# Altium PCB cw312_k82.PcbDoc
Units mm, origin at the board's own origin, x right, y up, seen from the top; angles counter-clockwise.
Board outline 58.68 x 53.69 mm, 2 copper layers (Top Layer, Bottom Layer); 20 components, 48 nets, 233 pads, 100 vias.
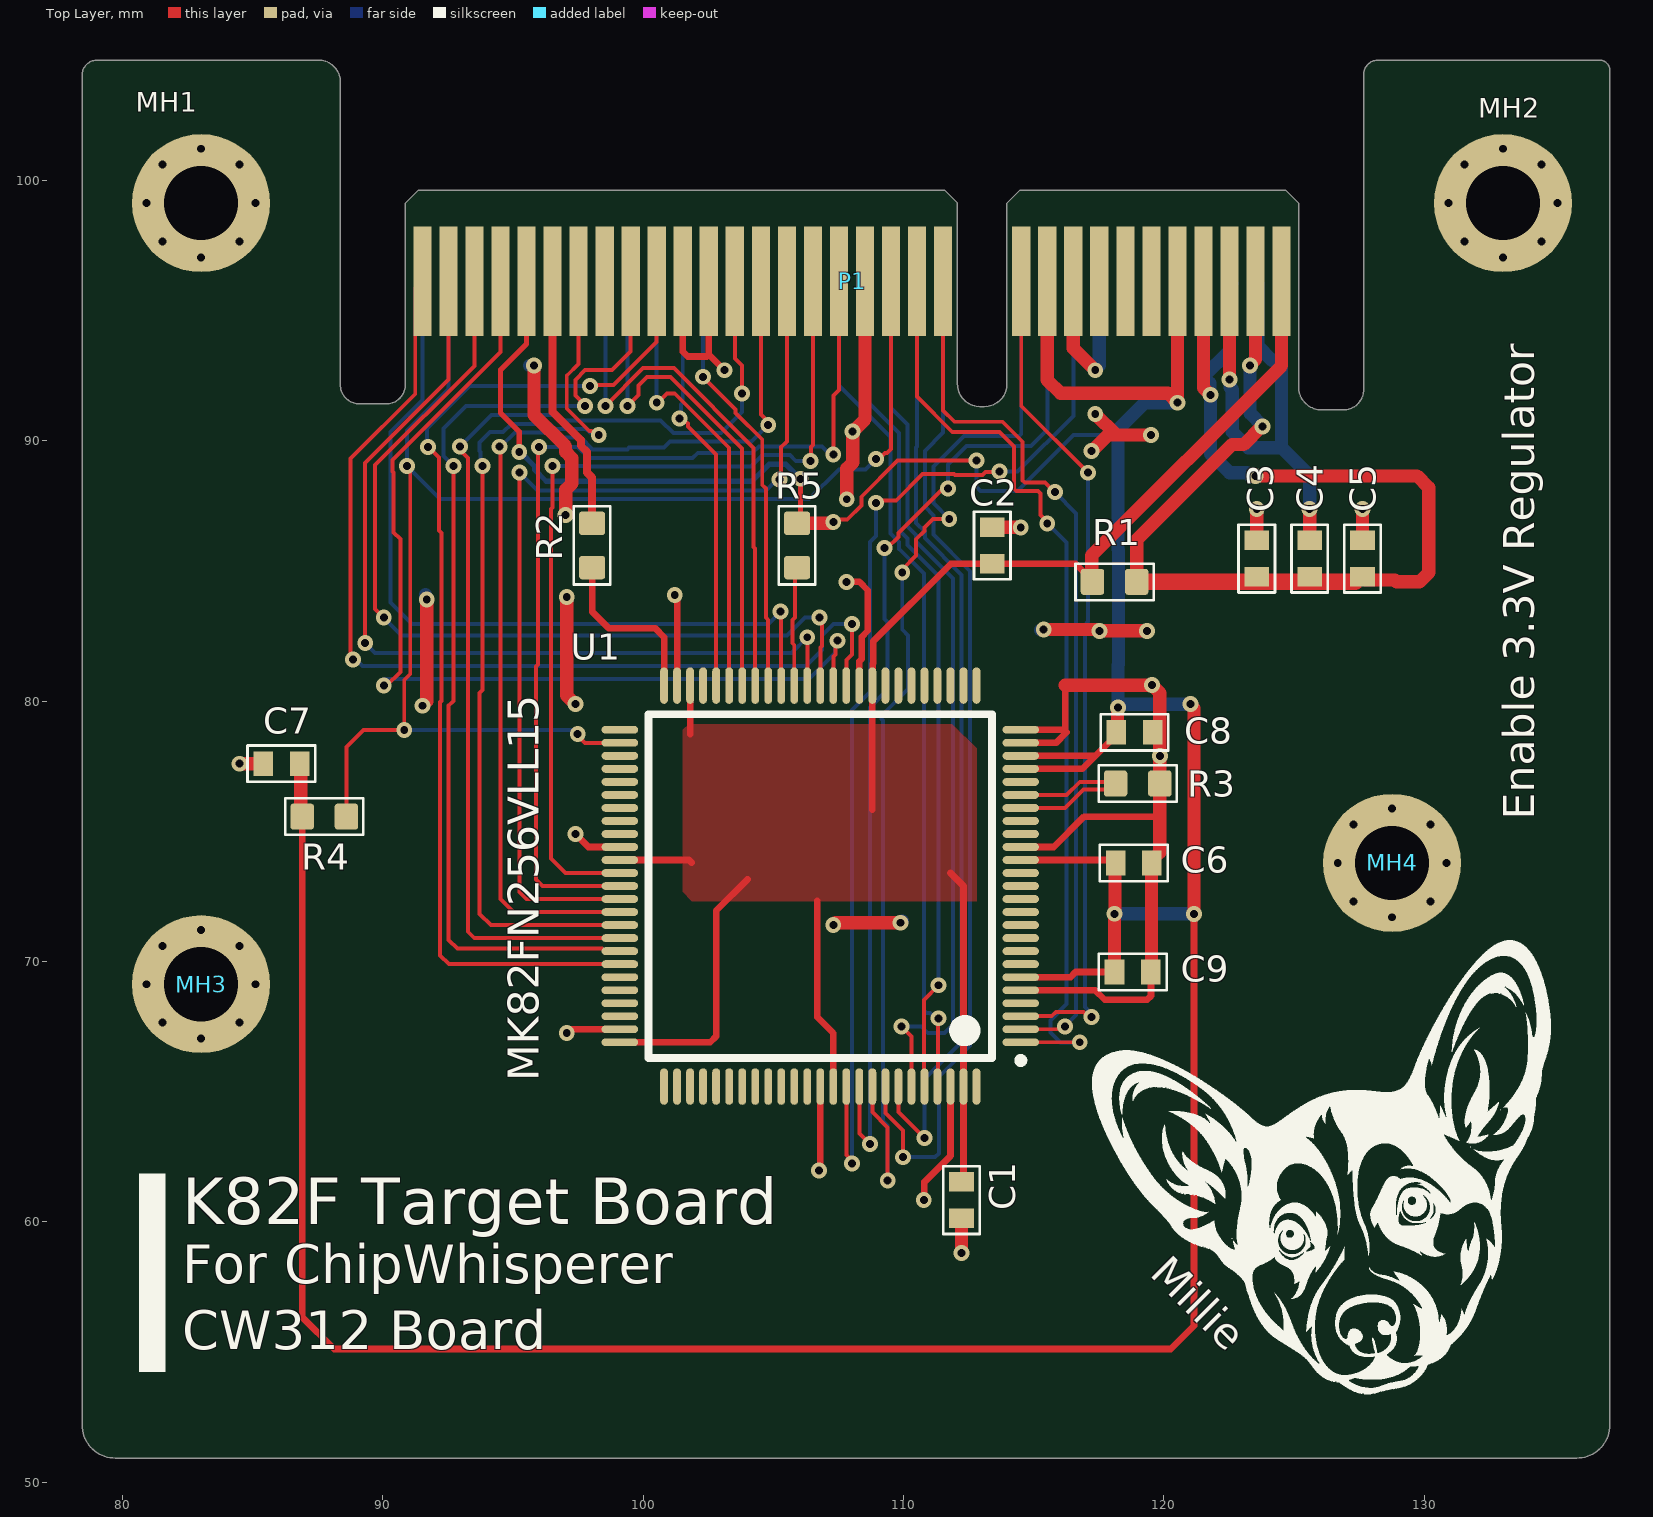
[diagram p0: Top Layer view]
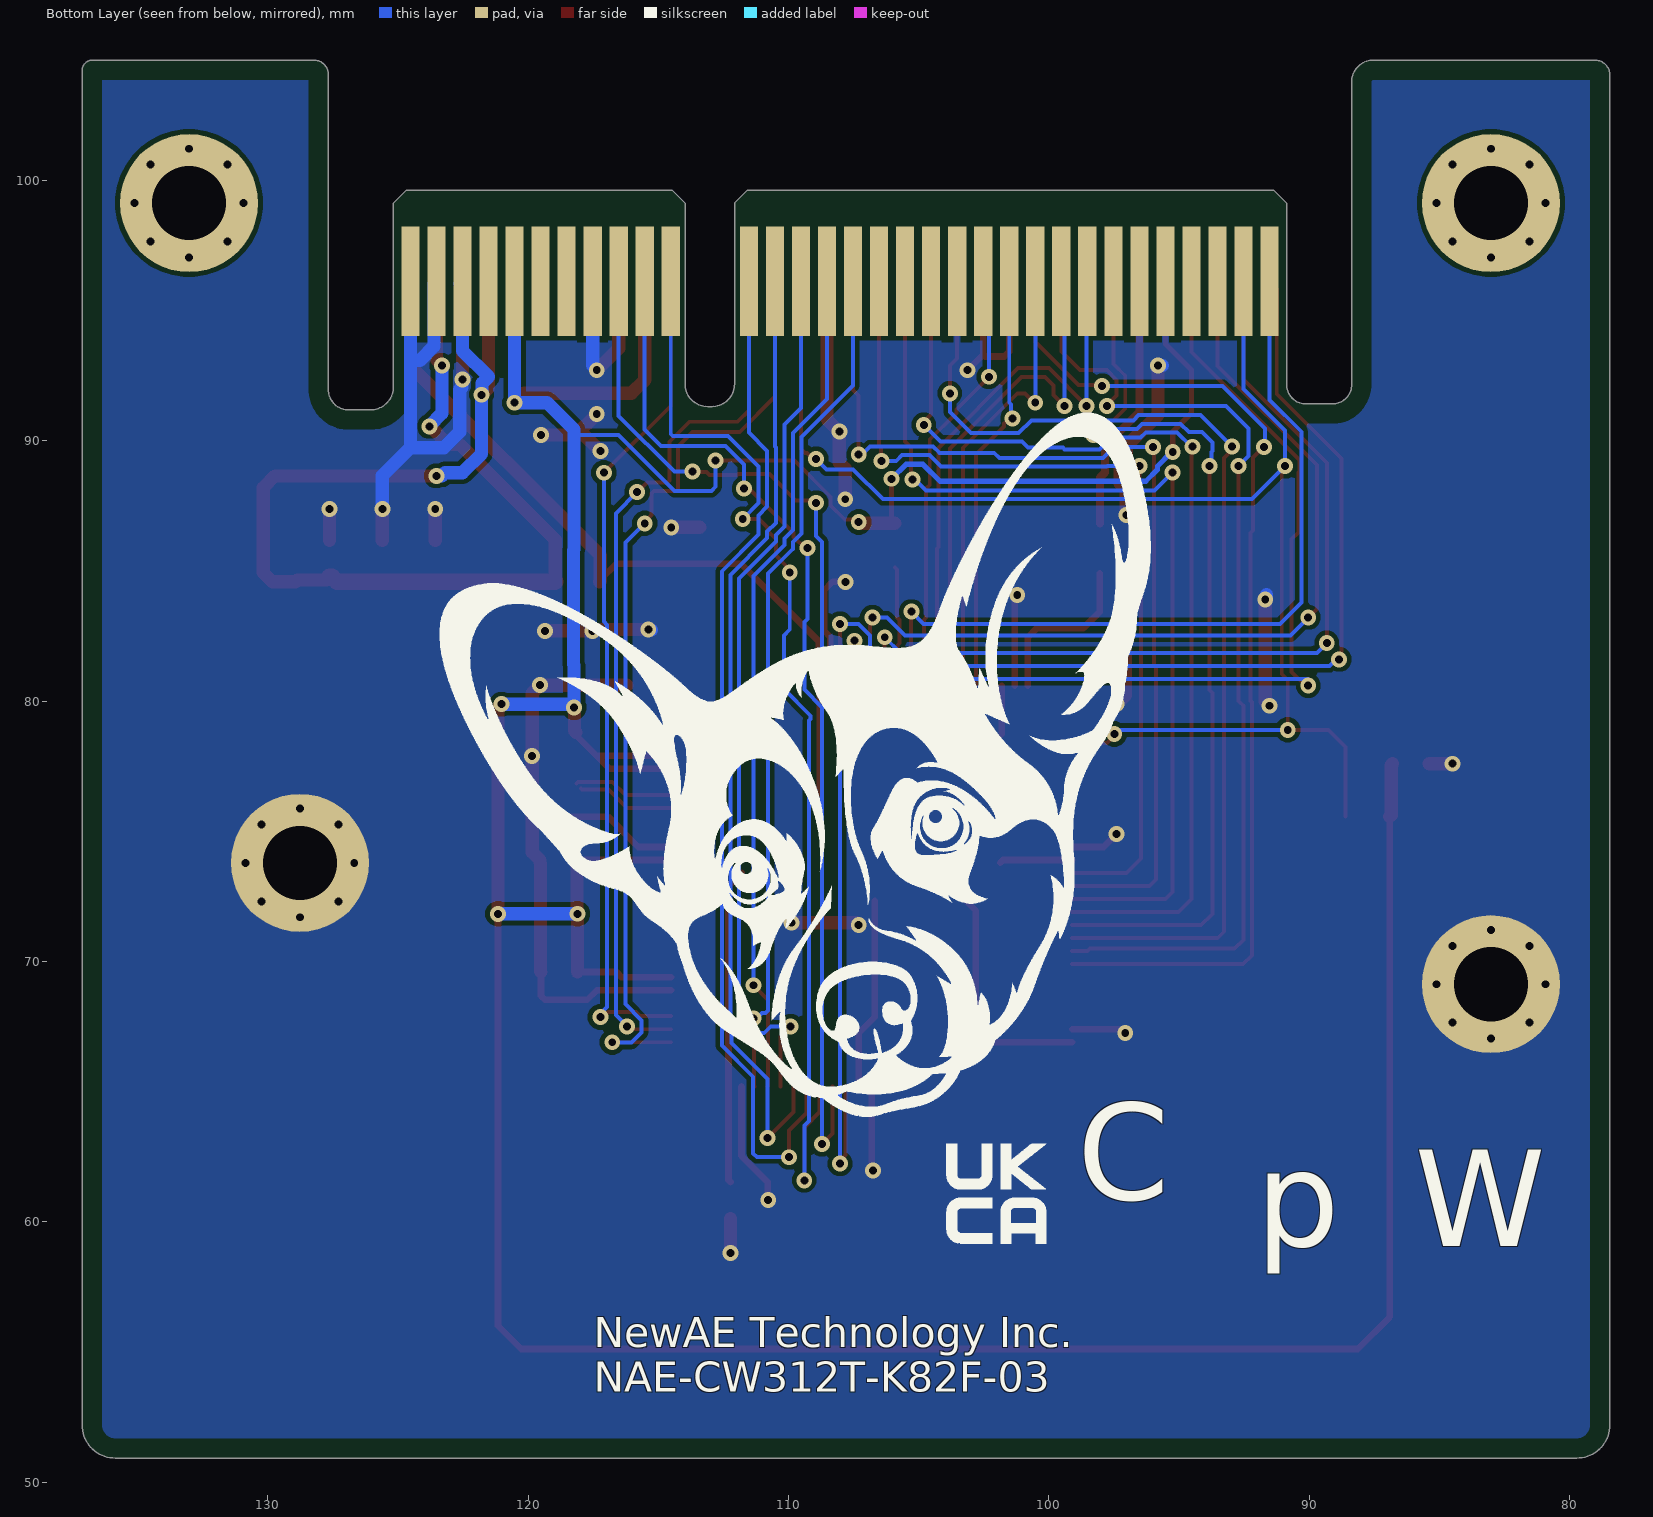
[diagram p1: Bottom Layer view, seen from below]
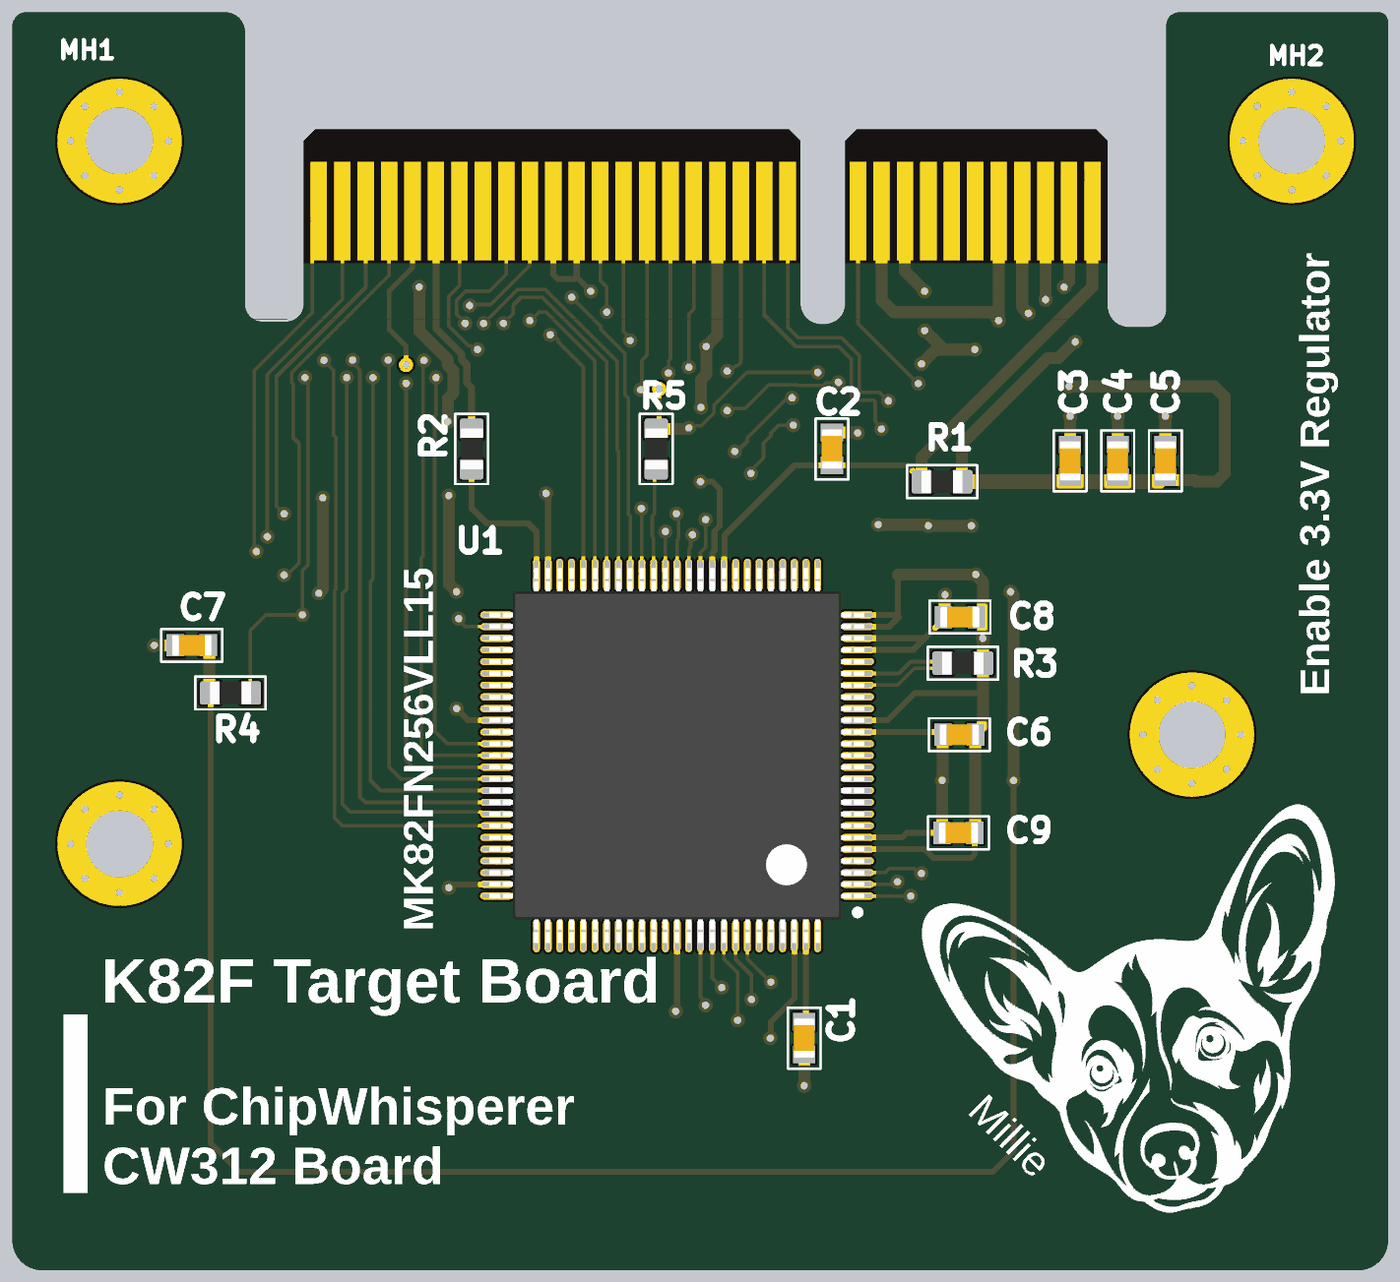
[diagram p2: 3D render of the assembled board from above, using the file's embedded part models]

## Layer stack, top to bottom
Top Solder: solder mask 0.0102, Solder Resist, Dk 3.5
Top Layer: signal copper 0.0356
Dielectric 1: dielectric 0.32, FR-4, Dk 4.8
Bottom Layer: signal copper 0.0356
Bottom Solder: solder mask 0.0102, Solder Resist, Dk 3.5

## Board outline
78.457,52.197 ccw(c79.727,52.197) 79.727,50.927 135.862,50.927 ccw(c135.862,52.197) 137.132,52.197 137.132,104.218 ccw(c136.732,104.218) 136.732,104.618 128.232,104.618 ccw(c128.232,104.061) 127.675,104.061 127.675,91.961 cw(c126.9,91.961) 126.9,91.186 126.064,91.186 cw(c126.064,92.075) 125.175,92.075 125.175,99.127 124.675,99.627 114.475,99.627 113.975,99.127 113.975,92.177 cw(c113.111,92.177) 113.111,91.313 112.939,91.313 cw(c112.939,92.177) 112.075,92.177 112.075,99.127 111.575,99.627 91.375,99.627 90.875,99.127 90.875,92.161 cw(c90.128,92.161) 90.128,91.415 89.114,91.415 cw(c89.114,92.153) 88.375,92.153 88.375,103.775 ccw(c87.532,103.775) 87.532,104.618 79.032,104.618 ccw(c79.032,104.043) 78.457,104.043

## Design rules (kind name [scope] priority, off if disabled: settings)
BoardOutlineClearance Silk_to_Outline [(OnLayer('Top Overlay'))] p1: gap=0 ignorepadtopadclearanceinfootprint=FALSE
BoardOutlineClearance [All] p2: gap=0.762 ignorepadtopadclearanceinfootprint=FALSE except(0.127: Track-OutlineEdge Track-CavityEdge Track-CutoutEdge Track-SplitBarrior Track-SplitContinuation SMDPad-OutlineEdge SMDPad-CavityEdge SMDPad-CutoutEdge SMDPad-SplitBarrior SMDPad-SplitContinuation)
Clearance [All] p1: gap=0.178 ignorepadtopadclearanceinfootprint=FALSE
HoleSize [All] p1: absolutevalues=TRUE maxlimit=5.08 minlimit=0.025 maxpercent=80.000 minpercent=20.000
MinimumSolderMaskSliver [All] p1: minsoldermaskwidth=0.127
PlaneConnect PlaneConnect_viaDirect [IsVia] p1: planeconnectstyle=Direct reliefexpansion=0.508 reliefentries=4 reliefconductorwidth=0.254 reliefairgap=0.254
PlaneConnect [All] p2: planeconnectstyle=Relief reliefexpansion=0.508 reliefentries=4 reliefconductorwidth=0.254 reliefairgap=0.254
PolygonConnect PolygonConnect_viaDirect [All vs isVia] p1: connectstyle=Direct reliefconductorwidth=0.254 reliefentries=4 polygonreliefangle="90 Angle" airgapwidth=0.254
PolygonConnect [All] p2: connectstyle=Relief reliefconductorwidth=0.254 reliefentries=4 polygonreliefangle="90 Angle" airgapwidth=0.254
RoutingVias [All] p1: holewidth=0.305 width=0.61 viastyle="Through Hole" minholewidth=0.305 minwidth=0.61 maxholewidth=2.54 maxwidth=5.08
SilkToSilkClearance [All] p1: silktosilkclearance=0.127
SilkToSolderMaskClearance [IsPad] p1: minsilkscreentomaskgap=0.127 clearancetoexposedcopper=TRUE
SolderMaskExpansion [All] p1: expansion=0.102 istentingtop=FALSE
Width [All] p1: maxlimit=2.54 minlimit=0.152 preferedwidth=0.203 minimp=50.000000 maximp=50.000000 favimp=50.000000
25 further rules are at their usual default settings.

## Classes and differential pairs
component class "Edge Connector": P1
component class CW312_K82_CardEdge: P1
component class CW312_K82: C1 C2 C3 C4 C5 C6 C7 C8 C9 C? R1 R2 R3 R4 R5 R? U1

## Components (designator, comment, footprint, x,y, rotation, side; value= is the part's Value field where it differs from the comment)
C1 "DNM" CAPC0603_M 112.23,60.833 r270 top value=100n
C2 "DNM" CAPC0603_M 113.411,85.979 r90 top value=100n
C3 "100n" CAPC0603_M 123.571,85.471 r90 top
C4 "100n" CAPC0603_M 125.603,85.471 r90 top
C5 "2u2" CAPC0603_M 127.635,85.471 r90 top
C6 "100n" CAPC0603_M 118.846,73.787 r0 top
C7 "100n" CAPC0603_M 86.106,77.597 r180 top
C8 "100n" CAPC0603_M 118.872,78.803 r0 top
C9 "100n" CAPC0603_M 118.807,69.596 r0 top
MH1 "4-40 MH, Tight Fit" MOUNT_#4_TIGHT 83.025,99.127 r0 top
MH2 "4-40 MH, Tight Fit" MOUNT_#4_TIGHT 133.025,99.127 r0 top
MH3 "4-40 MH, Tight Fit" MOUNT_#4_TIGHT 83.025,69.127 r0 top
MH4 "4-40 MH, Tight Fit" MOUNT_#4_TIGHT 128.768,73.787 r0 top
P1 "PCIeX4-GF-2D-1000-1K-O64" PCIeX4-GF-2D-1000-1K-O64 115.025,96.127 r180 top
R1 "10R" RESC1608X55N 118.11,84.582 r0 top
R2 "10R" RESC1608X55N 98.044,85.979 r270 top
R3 "10k" RESC1608X55N 118.999,76.835 r0 top
R4 "10k" RESC1608X55N 87.757,75.565 r180 top
R5 "10k" RESC1608X55N 105.918,85.979 r270 top
U1 "MK82FN256VLL15" SQFP50P1600X1600X170-100N 106.807,72.898 r180 top

## Footprints (in the part's own frame and the unit in brackets; to place one, negate y for a bottom-side part, rotate by r counter-clockwise, add the part's x,y. Pads: shape width x height; smd on the part's side, far side on the other; paste and mask are expansions set on the pad)
CAPC0603_M [mm]
  rect 0.75x0.95 smd: 1(-0.7,0) 2(0.7,0)
  silkscreen extent -1.3,-0.7 1.3,0.7, body extent -0.85,-0.45 0.85,0.45, height 0.9
MOUNT_#4_TIGHT [mil]
  round 14 hole 12: 1(-82.21,0) 1(-58.13,-58.13) 1(-58.13,58.13) 1(0,-82.21) 1(0,82.21) 1(58.13,-58.13) 1(58.13,58.13) 1(82.21,0)
  round 208.66 hole 112.2: 1(0,0)
PCIeX4-GF-2D-1000-1K-O64 [mm] "Golden finger, PCIeX4, Dual, Opposite, Pitch 1mm, 64-Position"
  rect 0.7x4.2 smd far side paste-1: A1(-9.5,0) A2(-8.5,0) A3(-7.5,0) A4(-6.5,0) A5(-5.5,0) A6(-4.5,0) A7(-3.5,0) A8(-2.5,0) A9(-1.5,0) A10(-0.5,0) A11(0.5,0) A12(3.5,0) A13(4.5,0) A14(5.5,0) A15(6.5,0) A16(7.5,0) A17(8.5,0) A18(9.5,0) A19(10.5,0) A20(11.5,0) A21(12.5,0) A22(13.5,0) A23(14.5,0) A24(15.5,0) A25(16.5,0) A26(17.5,0) A27(18.5,0) A28(19.5,0) A29(20.5,0) A30(21.5,0) A31(22.5,0) A32(23.5,0)
  rect 0.7x4.2 smd paste-1: B1(-9.5,0) B2(-8.5,0) B3(-7.5,0) B4(-6.5,0) B5(-5.5,0) B6(-4.5,0) B7(-3.5,0) B8(-2.5,0) B9(-1.5,0) B10(-0.5,0) B11(0.5,0) B12(3.5,0) B13(4.5,0) B14(5.5,0) B15(6.5,0) B16(7.5,0) B17(8.5,0) B18(9.5,0) B19(10.5,0) B20(11.5,0) B21(12.5,0) B22(13.5,0) B23(14.5,0) B24(15.5,0) B25(16.5,0) B26(17.5,0) B27(18.5,0) B28(19.5,0) B29(20.5,0) B30(21.5,0) B31(22.5,0) B32(23.5,0)
RESC1608X55N [mm] "Chip Resistor, Body 1.6x0.8mm, EIA 0603, IPC Medium Density"
  round 0.254 on Mech15: 0(0,0)
  rrect25% 0.9x1 smd: 1(-0.85,0) 2(0.85,0)
  Top Layer pour cut-out: -0.6,0.5 0.6,0.5 0.6,-0.5 -0.6,-0.5
  silkscreen extent -1.5,-0.7 1.5,0.7, body extent -0.87,-0.47 0.88,0.48, height 0.54
SQFP50P1600X1600X170-100N [mm] "SQFP, 100-Leads, Body 14.00x14.00mm, Pitch 0.50mm, IPC Medium Density"
  oval 1.4x0.3 smd paste-0.051: 1(-7.7,6) 2(-7.7,5.5) 3(-7.7,5) 4(-7.7,4.5) 5(-7.7,4) 6(-7.7,3.5) 7(-7.7,3) 8(-7.7,2.5) 9(-7.7,2) 10(-7.7,1.5) 11(-7.7,1) 12(-7.7,0.5) 13(-7.7,0) 14(-7.7,-0.5) 15(-7.7,-1) 16(-7.7,-1.5) 17(-7.7,-2) 18(-7.7,-2.5) 19(-7.7,-3) 20(-7.7,-3.5) 21(-7.7,-4) 22(-7.7,-4.5) 23(-7.7,-5) 24(-7.7,-5.5) 25(-7.7,-6) 51(7.7,-6) 52(7.7,-5.5) 53(7.7,-5) 54(7.7,-4.5) 55(7.7,-4) 56(7.7,-3.5) 57(7.7,-3) 58(7.7,-2.5) 59(7.7,-2) 60(7.7,-1.5) 61(7.7,-1) 62(7.7,-0.5) 63(7.7,0) 64(7.7,0.5) 65(7.7,1) 66(7.7,1.5) 67(7.7,2) 68(7.7,2.5) 69(7.7,3) 70(7.7,3.5) 71(7.7,4) 72(7.7,4.5) 73(7.7,5) 74(7.7,5.5) 75(7.7,6)
  oval 0.3x1.4 smd paste-0.051: 26(-6,-7.7) 27(-5.5,-7.7) 28(-5,-7.7) 29(-4.5,-7.7) 30(-4,-7.7) 31(-3.5,-7.7) 32(-3,-7.7) 33(-2.5,-7.7) 34(-2,-7.7) 35(-1.5,-7.7) 36(-1,-7.7) 37(-0.5,-7.7) 38(0,-7.7) 39(0.5,-7.7) 40(1,-7.7) 41(1.5,-7.7) 42(2,-7.7) 43(2.5,-7.7) 44(3,-7.7) 45(3.5,-7.7) 46(4,-7.7) 47(4.5,-7.7) 48(5,-7.7) 49(5.5,-7.7) 50(6,-7.7) 76(6,7.7) 77(5.5,7.7) 78(5,7.7) 79(4.5,7.7) 80(4,7.7) 81(3.5,7.7) 82(3,7.7) 83(2.5,7.7) 84(2,7.7) 85(1.5,7.7) 86(1,7.7) 87(0.5,7.7) 88(0,7.7) 89(-0.5,7.7) 90(-1,7.7) 91(-1.5,7.7) 92(-2,7.7) 93(-2.5,7.7) 94(-3,7.7) 95(-3.5,7.7) 96(-4,7.7) 97(-4.5,7.7) 98(-5,7.7) 99(-5.5,7.7) 100(-6,7.7)
  silkscreen extent -7.83,-6.6 6.6,6.82, body extent -8,-8 8,8, height 1.7

## Part data
C1 C2: library part CCHIP-100n-0603, Case-EIA=0603, Case-Metric=1608, Manufacture 1=Kemet, Manufacture Part Number 1=C0603C104K5RACTU, Rated Voltage=50VDC, Supplier Part Number 1=399-5089-2-ND, Component Group=Capacitor, Component Type=Standard, Mounting Technology=SMT, Part Number=CCHIP-100n-0603, Pin Count=2, Supplier 1=Digi-Key
C3 C4 C6 C7 C8 C9: library part CCHIP-100n-0603, "100n, 0603", Case-EIA=0603, Case-Metric=1608, Manufacture 1=Kemet, Manufacture Part Number 1=C0603C104K5RACTU, Rated Voltage=50VDC, Supplier Part Number 1=399-5089-2-ND, Component Group=Capacitor, Component Type=Standard, Mounting Technology=SMT, Part Number=CCHIP-100n-0603, Pin Count=2, Supplier 1=Digi-Key
C5: library part CCHIP-2u2-0603, "2u2, 0603", Case-EIA=0603, Case-Metric=1608, Manufacture 1=Samsung, Manufacture Part Number 1=CL10B225KP8NNNC, Rated Voltage=10VDC, Supplier Part Number 1=1276-1134-2-ND, Component Group=Capacitor, Component Type=Standard, Mounting Technology=SMT, Part Number=CCHIP-2u2-0603, Pin Count=2, Supplier 1=Digi-Key
MH1 MH2 MH3 MH4: library part MOUNT_#4_TIGHT, "Machine screw 4-40 Mounting Hole", Component Group=Mechanical, Component Type=Mechanical, Part Number=MOUNT_#4_TIGHT, Pin Count=1, PP Material Stack=0, PP Rotation=0
P1: library part CMP-0001-00031-2, "Golden finger, PCIeX4, Dual, Opposite, Pitch 1mm, 64-Position", ClassName="Edge Connector", Datasheet Version="rev2.0, Apr-2007", Mating Connector=Molex-87715-9106, Package Reference=PCIeX4-GF-2D-1000-1K-O64, Publisher=Altium
R1 R2: library part RCHIP-10R-0603, "10R res, 0603, 1%, 1/10W", Case-EIA=0603, Case-Metric=1608, Manufacture 1=Yageo, Manufacture Part Number 1=RC0603FR-0710RL, Rated Power=0.1W, Rated Voltage=75VDC, Supplier Part Number 1=311-10.0HRCT-ND, Temperature Range="-55C to 155C", Tolerance=1%, Component Group=Resistor, Component Type=Standard, Mounting Technology=SMT, Part Number=RCHIP-10R-0603, Pin Count=2, Supplier 1=Digi-Key
R3 R4 R5: library part RCHIP-10K-0603, "10k res, 0603, 1%, 1/10W", Case-EIA=0603, Case-Metric=1608, Manufacture 1=Yageo, Manufacture Part Number 1=RC0603FR-0710KL, Rated Power=0.1W, Rated Voltage=75VDC, Supplier Part Number 1=311-10.0KHRCT-ND, Temperature Range="-55C to 155C", Tolerance=1%, Component Group=Resistor, Component Type=Standard, Mounting Technology=SMT, Part Number=RCHIP-10K-0603, Pin Count=2, Supplier 1=Digi-Key
U1: "ARM® Cortex®-M4 Kinetis K8x Microcontroller IC 32-Bit 150MHz 256KB (256K x 8) FLASH 100-LQFP (14x14)", Manufacture 1=NXP, Supplier Part Number 1=MK82FN256VLL15-ND, Component Group="Digital IC", Component Type=Standard, Manufacture Part Number 1=MK82FN256VLL15, Mounting Technology=SMT, Part Number=MK82FN256VLL15, Pin Count=100, PP Material Stack=0, PP Rotation=0, RoHS=Yes, Supplier 1=Digi-Key

## Via types
v1: diameter 0.61, hole 0.305, Top Layer to Bottom Layer, tented both sides, 98 vias
v2: diameter 0.61, hole 0.305, Top Layer to Bottom Layer, 2 vias

## Nets (pads, with @x,y where several pads share a name; then routed paths per layer and width w, separated by ;. In a path a pad name is that pad's centre, name@x,y a point inside that pad or via, vN(x,y) a via of type N, cw(c..) or ccw(c..) an arc to the next point about the centre after c; other vN are vias at no path point)
CLKIN: P1.B27 R2.1 | length 9.9
  Top Layer w0.305: P1.B27 96.525,91.11 97.609,90.026 97.609,89.811 97.846,89.574 97.846,88.783 98.044,88.585 R2.1
CS: P1.B26 U1.66 | length 35.5
  Top Layer w0.152: v1(93.832,89.027) 93.832,80.421 93.726,80.315 93.726,71.832 94.16,71.398 U1.66 ; P1.B26 97.525,92.953 97.07,92.498 97.07,91.244 97.933,90.381 98.016,90.381 98.174,90.222 v1(98.298,90.222)
  Bottom Layer w0.152: v1(93.832,89.027) 93.764,89.095 93.764,89.56 93.726,89.598 93.726,89.94 94.117,90.33 94.626,90.33 94.947,90.651 96.419,90.651 96.619,90.451 97.817,90.451 97.958,90.31 98.211,90.31 v1(98.298,90.222)
FILT_HP: C3.1 C4.1 C5.1 P1.A3 P1.B2 P1.B4 R1.2 | length 49.6
  Top Layer w0.508: R1.2 118.96,86.197 122.617,89.854 123.064,89.854 123.761,90.551 v1(123.788,90.551) ; P1.B4 121.525,92.033 v1(121.793,91.765) ; v1(123.314,92.89) 123.314,92.917 123.525,93.128 P1.B2 ; v1(123.525,88.65) 129.725,88.65 130.175,88.2 130.175,84.936 129.821,84.582 128.94,84.582 128.872,84.65 127.756,84.65 C5.1
  Top Layer w0.635: R1.2 127.346,84.582 127.535,84.771 C5.1
  Bottom Layer w0.152: v1@123.314,88.65 v1(123.525,88.65)
  Bottom Layer w0.508: P1.A3@122.621,96.031 P1.A3 122.525,93.456 121.525,92.456 121.774,92.207 121.774,91.784 v1(121.793,91.765) 121.793,89.505 122.525,88.773 123.191,88.773 v1@123.314,88.65 ; v1(123.314,92.89) 123.314,91.053 123.788,90.578 v1(123.788,90.551)
FILTIN: C6.1 C7.1 C8.1 C9.1 P1.A5 P1.B5 P1.B10 P1.B28 R4.2 R5.1 U1.6 U1.15 U1.22 U1.23 | length 174.3
  Top Layer w0.152: v1(107.307,86.88) 107.394,86.967 107.827,86.967 108.382,87.522 108.382,87.849 109.778,89.245 v1(112.807,89.245)
  Top Layer w0.203: v2(95.245,89.568) 95.25,89.572 95.25,90.343 94.525,91.068 94.525,92.723 95.525,93.723 P1.B28 ; R5.1 106.043,86.954 v2(106.043,88.54)
  Top Layer w0.254: R4.2 86.907,56.349 88.138,55.118 120.269,55.118 121.158,56.007 v1(121.158,71.831) ; U1.6 116.415,69.398 116.613,69.596 C9.1 ; U1.15 118.035,73.898 C6.1 ; U1.22 116.867,77.398 117.367,77.898 ; U1.23 117.367,77.898 ; C8.1 118.172,78.703 117.367,77.898
  Top Layer w0.508: C7.1 86.857,77.546 86.857,75.615 R4.2 ; R5.1 107.229,86.829 107.28,86.88 v1(107.307,86.88) ; P1.B10 115.525,92.331 116.035,91.821 120.166,91.821 v1(120.525,91.462) P1.B5 ; C9.1 118.108,69.597 118.108,71.831 118.128,71.85 118.128,73.769 C6.1 ; C8.1 118.218,78.849 118.218,79.737 v1(118.237,79.756) ; v1(121.031,79.883) 121.031,79.856 121.158,79.729 v1(121.158,71.831)
  Bottom Layer w0.152: v1(112.807,89.245) 112.807,88.234 112.967,88.074 114.377,88.074 116.525,90.222 118.035,90.222 118.237,90.424
  Bottom Layer w0.203: v2(95.245,89.568) 95.289,89.568 95.834,89.022 95.834,88.892 96.283,88.443 104.188,88.443 104.84,89.095 105.489,89.095 106.043,88.541 v2(106.043,88.54)
  Bottom Layer w0.508: v1(118.11,71.832) 121.156,71.832 v1(121.158,71.831) ; P1.A5 v1(120.525,91.462) 119.275,91.462 118.237,90.424 118.237,85.832 118.262,85.807 118.262,81.416 118.237,81.392 v1(118.237,79.756) 118.364,79.883 v1(121.031,79.883)
GND: C1.2 C2.2 C3.2 C4.2 C5.2 C6.2 C7.2 C8.2 C9.2 MH3.1 MH4.1 P1.A1 P1.A2 P1.A8 P1.A20 P1.A27 P1.A28 P1.B3 P1.B9 P1.B15 P1.B21 P1.B22 R3.2 U1.5 U1.16 U1.24 U1.25 U1.35 U1.49 U1.60 U1.74 U1.88 U1.98 | length 129.1
  Top Layer w0.254: v1(97.07,67.249) 97.219,67.398 U1.74 ; v1(97.4,74.898) 97.9,74.398 U1.60 ; v1(101.218,84.082) 101.307,83.993 U1.49 ; P1.B22 101.525,93.427 101.717,93.235 102.451,93.235 102.525,93.309 ; P1.B21 102.525,93.309 ; v1(103.124,92.71) 102.525,93.309 ; v1(106.751,61.976) 106.807,62.032 U1.88 ; v1(107.807,84.582) 108.307,84.582 108.632,84.257 108.632,82.7 108.404,82.471 108.404,81.629 108.307,81.532 U1.35 ; v1(110.783,60.833) 110.807,60.857 110.807,61.533 111.807,62.533 U1.98 ; U1.5 117.36,68.898 117.729,68.529 119.358,68.529 119.507,68.678 C9.2 ; U1.16 115.772,74.398 116.939,75.565 119.849,75.565 ; U1.24 115.863,78.398 116.268,78.803 ; U1.25 116.219,78.898 116.219,80.61
  Top Layer w0.508: v1(84.501,77.597) C7.2 ; v1(91.525,79.823) 91.693,79.992 v1(91.693,83.898) ; v1(95.809,92.895) 95.809,91 97.025,89.784 97.025,89.569 97.262,89.332 97.262,88.354 97.033,88.125 97.033,87.155 v1(97.025,87.147) ; v1(97.07,83.993) 97.07,80.213 v1(97.4,79.883) ; v1(107.307,71.398) 107.397,71.488 v1(109.886,71.488) ; v1(107.823,87.753) 107.823,88.934 108.05,89.161 v1(108.05,90.355) 108.525,90.831 P1.B15 ; v1(112.23,58.801) C1.2 ; C2.2 114.492,86.679 v1(114.507,86.664) ; v1(115.387,82.748) 117.477,82.748 v1(117.525,82.7) v1(119.358,82.7) ; 116.219,80.61 119.542,80.61 v1(119.551,80.62) ; P1.B9 116.525,93.552 v1(117.367,92.71) ; v1(117.23,89.613) 117.258,89.613 117.867,90.222 118.172,90.222 ; v1(117.367,91.028) 118.172,90.222 ; C9.2 119.526,69.615 119.526,73.768 C6.2 119.546,73.887 119.849,74.19 119.849,75.565 R3.2 v1(119.849,77.898) 119.849,80.312 v1@119.551,80.61 ; v1(119.507,90.222) 118.172,90.222 ; v1(122.525,92.354) P1.B3 ; C3.2 v1(123.571,87.376) ; C4.2 v1(125.603,87.376) ; C5.2 v1(127.635,87.376)
  Bottom Layer w0.508: v1@91.644,84.082 91.644,83.947 v1(91.693,83.898) ; v1@95.652,92.895 v1(95.809,92.895) ; v1(109.886,71.488) v1@109.955,71.557 ; v1@115.266,82.733 115.372,82.733 v1(115.387,82.748) ; v1(117.367,92.71) 117.367,92.737 117.525,92.895 P1.A8 ; v1(122.525,92.354) 122.544,92.334 122.544,92.055 122.628,91.971 122.628,90.349 123.243,89.735 124.525,89.735 ; P1.A2 123.621,96.031 123.621,93.624 124.154,93.091 124.525,93.091 ; P1.A1 124.525,93.091 ; v1(125.603,87.376) 125.603,88.657 124.525,89.735 ; 124.525,89.735 124.525,93.091
GPIO1_TX: P1.B16 U1.63 | length 38.5
  Top Layer w0.152: v1(96.009,89.758) 95.966,89.715 95.966,81.412 95.885,81.331 95.885,73.152 96.139,72.898 U1.63 ; v1(107.307,89.471) 107.307,91.74 107.525,91.958 P1.B16
  Bottom Layer w0.152: v1(96.009,89.758) 96.013,89.762 97.49,89.762 97.918,89.333 101.907,89.333 102.112,89.539 104.206,89.539 104.449,89.781 106.873,89.781 107.183,89.471 v1(107.307,89.471)
GPIO2_RX: P1.B17 U1.62 | length 35.1
  Top Layer w0.152: v1(96.525,89.027) 96.525,87.437 96.466,87.378 96.466,73.957 97.025,73.398 U1.62 ; v1(106.436,89.222) 106.449,89.235 106.449,89.755 106.525,89.832 P1.B17
  Bottom Layer w0.152: v1(96.525,89.027) 97.758,89.027 97.782,89.003 104.138,89.003 104.585,89.451 105.636,89.451 105.865,89.222 v1(106.436,89.222)
GPIO3: P1.B18 U1.64 | length 38.3
  Top Layer w0.152: v1(95.25,88.78) 95.25,72.673 95.525,72.398 U1.64 ; v1(105.247,88.511) 105.307,88.571 105.307,89.762 105.525,89.98 P1.B18
  Bottom Layer w0.152: v1(95.25,88.78) 95.943,88.087 104.721,88.087 105.144,88.511 v1(105.247,88.511)
GPIO4: P1.B19 U1.65 | length 39
  Top Layer w0.152: v1(94.485,89.772) 94.525,89.731 94.525,72.398 95.025,71.898 U1.65 ; P1.B19 104.525,91.012 104.807,90.73 v1(104.807,90.606)
  Bottom Layer w0.152: v1(94.485,89.772) 94.535,89.772 95.084,90.321 96.282,90.321 96.482,90.121 97.609,90.121 98.067,89.663 99.397,89.663 99.469,89.735 100.799,89.735 101.028,89.963 104.164,89.963 v1(104.807,90.606)
HDR1: P1.A9 U1.90 | length 43
  Top Layer w0.152: U1.90 107.807,62.577 108.023,62.361 v1(108.023,62.237) ; v1(108.941,87.618) 109.028,87.705 109.724,87.705 110.738,88.719 111.941,88.719 111.974,88.686 113.038,88.686 113.154,88.801 113.665,88.801 v1(113.687,88.824)
  Bottom Layer w0.152: v1(108.023,62.237) 108.023,79.661 108.712,80.351 108.712,86.106 108.941,86.335 v1(108.941,87.618) ; v1(113.687,88.824) 114.389,88.824 116.525,90.959 P1.A9
HDR2: P1.A10 U1.91 | length 40.1
  Top Layer w0.152: U1.91 108.307,63.397 v1(108.712,62.992) ; v1(109.271,85.875) 109.367,85.875 109.802,86.31 109.802,86.45 111.425,88.073 111.622,88.073 v1(111.709,88.161)
  Bottom Layer w0.152: v1(108.712,62.992) 108.712,79.756 109.396,80.44 109.396,83.033 109.271,83.158 v1(109.271,85.875) ; v1(111.709,88.161) 111.709,89.096 112.417,89.804 114.902,89.804 115.525,90.426 P1.A10
HDR3: P1.A11 U1.92 | length 43
  Top Layer w0.152: U1.92 108.807,64.221 109.396,63.632 v1(109.396,61.595) ; v1(109.955,84.936) 109.955,85.06 110.49,85.595 110.49,86.217 110.806,86.534 110.806,86.664 111.137,86.995 v1(111.76,86.995)
  Bottom Layer w0.152: v1(109.396,61.595) 109.396,63.705 109.22,63.881 109.22,79.248 109.156,79.312 109.156,79.438 110.179,80.461 110.179,82.525 109.955,82.748 v1(109.955,84.936) ; v1(111.76,86.995) 111.15,87.605 111.15,89.004 112.323,90.177 114.436,90.177 114.525,90.266 P1.A11
HDR4: P1.A12 U1.93 | length 39.4
  Top Layer w0.152: U1.93 109.307,64.188 109.982,63.513 v1(109.982,62.484)
  Bottom Layer w0.152: v1(109.982,62.484) 111.218,62.484 111.366,62.632 111.366,65.574 112.561,66.768 112.561,84.988 111.15,86.399 111.15,87.138 110.82,87.468 110.82,89.613 111.525,90.318 P1.A12
HDR5: P1.A13 U1.94 | length 36.6
  Top Layer w0.152: U1.94 109.807,64.224 v1(110.807,63.224)
  Bottom Layer w0.152: P1.A13 110.525,92.354 110.525,89.785 110.49,89.75 110.49,86.847 110.82,86.516 110.82,86.262 112.23,84.852 112.23,67.29 112.199,67.259 112.199,66.874 110.807,65.482 v1(110.807,63.224)
HDR6: P1.A14 U1.95 | length 34.2
  Top Layer w0.152: v1(109.921,67.51) 110.307,67.124 U1.95
  Bottom Layer w0.152: P1.A14 109.525,91.259 110.16,90.624 110.16,86.71 110.49,86.38 110.49,86.125 111.9,84.715 111.9,67.587 111.573,67.259 110.934,67.259 110.684,67.51 v1(109.921,67.51)
HDR7: P1.A15 U1.96 | length 32.3
  Top Layer w0.152: U1.96 110.783,65.222 110.783,68.529 v1(111.341,69.088)
  Bottom Layer w0.152: P1.A15 108.525,91.598 109.83,90.294 109.83,86.573 110.16,86.243 110.16,85.988 111.341,84.807 v1(111.341,69.088)
HDR8: P1.A16 U1.97 | length 32.7
  Top Layer w0.152: U1.97 111.324,65.215 111.324,67.801 v1(111.341,67.818)
  Bottom Layer w0.152: P1.A16 107.525,92.115 109.499,90.141 109.499,86.436 109.83,86.106 109.83,85.852 110.783,84.899 110.783,68.121 110.89,68.014 111.022,68.014 111.218,67.818 v1(111.341,67.818)
HDR9: P1.A17
HDR10: P1.A18
JTAG_TCK: P1.B32 U1.36 | length 38.4
  Top Layer w0.152: v1(88.857,81.603) 88.77,81.69 88.77,89.321 91.251,91.803 91.251,95.854 P1.B32 ; U1.36 107.807,81.571 108.023,81.787 v1(108.023,82.966)
  Bottom Layer w0.152: v1(88.857,81.603) 88.98,81.603 89.227,81.356 106.256,81.356 106.866,81.966 106.866,82.513 107.319,82.966 v1(108.023,82.966)
JTAG_TDI: P1.B29 U1.37 | length 37.9
  Top Layer w0.152: v1(90.043,80.598) 90.151,80.598 90.678,81.125 90.678,86.219 90.424,86.473 90.424,88.773 90.373,88.824 90.373,89.258 94.525,93.41 P1.B29 ; U1.37 107.307,81.711 107.383,81.787 107.383,82.24 v1(107.464,82.321)
  Bottom Layer w0.152: v1(90.043,80.598) v1@90.043,80.722 ; v1@90.043,80.848 106.375,80.848 107.376,81.849 107.376,82.233 v1(107.464,82.321)
JTAG_TDO: P1.B30 U1.38 | length 34.6
  Top Layer w0.152: v1(90.043,83.215) 89.712,83.545 89.712,89.064 93.525,92.877 P1.B30 ; v1(106.777,83.215) 106.865,83.127 106.865,82.606 106.866,82.605 106.866,82.124 106.807,82.066 U1.38
  Bottom Layer w0.152: v1(90.043,83.215) 90.043,83.199 90.729,82.513 105.525,82.513 106.227,83.215 v1(106.777,83.215)
JTAG_TMS: P1.B31 U1.39 | length 34.5
  Top Layer w0.152: v1(89.329,82.233) 89.329,89.148 92.525,92.344 P1.B31 ; U1.39 v1(106.307,82.454)
  Bottom Layer w0.152: v1(89.329,82.233) 89.712,81.849 105.702,81.849 v1(106.307,82.454)
JTAG_TRST: P1.A32 U1.41 | length 31.2
  Top Layer w0.152: v1(105.283,83.439) 105.295,83.427 105.295,80.61 U1.41
  Bottom Layer w0.152: P1.A32 91.525,91.574 90.297,90.346 90.297,83.79 91.121,82.966 104.81,82.966 v1(105.283,83.439)
JTAG_VREF: P1.A26
LED1: P1.B11 U1.3 | length 32.4
  Top Layer w0.152: U1.3 115.696,67.898 115.866,68.069 116.923,68.069 117.124,67.868 v1(117.23,67.868) ; P1.B11 114.525,91.342 v1(117.094,88.773)
  Bottom Layer w0.152: v1(117.094,88.773) 117.094,83.059 116.966,82.931 116.966,68.255 117.23,67.991 v1(117.23,67.868)
LED2: P1.B12 U1.2 | length 34.2
  Top Layer w0.152: P1.B12 111.525,91.16 111.955,90.73 113.808,90.73 114.576,89.961 114.576,88.481 114.665,88.392 115.436,88.392 115.798,88.031 v1(115.817,88.031) ; U1.2 116.093,67.398 v1(116.205,67.51)
  Bottom Layer w0.152: v1(115.817,88.031) 116.636,87.211 116.636,67.941 v1(116.205,67.51)
LED3: P1.B13 U1.1 | length 36.6
  Top Layer w0.152: P1.B13 110.525,91.693 111.876,90.343 113.687,90.343 114.246,89.784 114.246,88.151 114.335,88.062 115.169,88.062 115.258,87.973 115.258,87.147 115.525,86.88 v1(115.525,86.829) ; U1.1 v1(116.772,66.898)
  Bottom Layer w0.152: v1(115.525,86.829) 116.27,86.084 116.27,68.365 115.646,67.741 115.646,67.278 116.032,66.893 116.767,66.893 v1(116.772,66.898)
MISO: P1.B23 U1.69 | length 40.1
  Top Layer w0.152: v1(91.745,89.759) 92.155,89.349 92.155,86.556 92.252,86.459 92.252,80.011 92.201,79.96 92.201,70.237 92.541,69.898 U1.69 ; v1(97.959,92.103) 98,92.144 98.87,92.144 100.525,93.799 P1.B23
  Bottom Layer w0.152: v1(91.745,89.759) 91.694,89.81 91.694,90.47 93.327,92.103 v1(97.959,92.103)
MOSI: P1.B24 U1.68 | length 38.8
  Top Layer w0.152: v1(92.714,89.027) 92.714,80.006 92.532,79.823 92.532,70.834 92.871,70.494 98.421,70.494 98.517,70.398 U1.68 ; v1(97.765,91.34) 97.765,91.365 97.4,91.73 97.4,92.334 97.775,92.71 98.806,92.71 99.525,93.429 P1.B24
  Bottom Layer w0.152: v1(92.714,89.027) 92.329,89.412 92.329,90.47 93.199,91.34 v1(97.765,91.34)
NetR2_2: R2.2 U1.50 | length 6.5
  Top Layer w0.254: R2.2@98.044,84.905 98.044,83.439 98.679,82.804 100.457,82.804 100.807,82.454 U1.50
NetR3_1: R3.1 U1.19 U1.20 | length 7.7
  Top Layer w0.152: U1.19 116.205,75.898 116.919,76.612 117.942,76.612 R3.1@117.979,76.649 ; U1.20 116.268,76.398 116.772,76.902 118.082,76.902 R3.1
NetR5_2: R5.2 U1.40 | length 4.6
  Top Layer w0.152: U1.40 105.807,82.164 105.748,82.223 105.748,83.114 105.842,83.208 105.842,85.053 R5.2
nRST: P1.A31 P1.B14 R4.1 U1.52 | length 58.1
  Top Layer w0.152: R4.1 88.607,78.235 89.27,78.898 v1(90.828,78.898) 90.828,80.808 91.059,81.039 91.059,88.776 90.932,88.903 v1(90.932,89.027) ; v1(97.49,78.74) 97.49,78.684 97.775,78.398 U1.52 ; v1(108.941,89.304) 109.064,89.304 109.284,89.524 109.367,89.524 109.525,89.682 P1.B14
  Bottom Layer w0.152: v1(90.828,78.898) 97.332,78.898 v1(97.49,78.74) ; P1.A31 92.525,91.981 90.932,90.388 v1(90.932,89.027) 92.202,87.757 106.379,87.757 107.525,88.903 108.54,88.903 v1(108.941,89.304)
nRST_OUT: P1.A19
SCK: P1.B20 U1.67 | length 41.8
  Top Layer w0.152: v1(92.968,89.773) 92.968,89.649 93.273,89.343 93.273,71.142 93.517,70.898 U1.67 ; P1.B20 103.525,93.165 103.807,92.883 v1(103.807,91.821)
  Bottom Layer w0.152: v1(92.968,89.773) 92.975,89.773 94.183,90.981 96.556,90.981 96.756,90.781 100.677,90.781 101.165,90.294 102.995,90.294 103.807,91.105 v1(103.807,91.821)
SHUNTL: C1.1 C2.1 P1.B1 R1.1 U1.34 U1.48 U1.61 U1.75 U1.89 U1.99 | length 65.5
  Top Layer w0.254: U1.75 102.581,66.898 102.807,67.124 102.807,71.946 104.013,73.152 ; U1.61 101.764,73.898 101.875,73.787 ; 101.807,78.727 U1.48 ; 106.697,72.323 106.697,67.859 107.307,67.249 U1.89 ; 108.807,75.839 U1.34 108.816,80.607 108.816,81.43 108.836,81.45 108.836,82.293 111.822,85.279 C2.1 116.613,85.279 117.23,84.662 117.26,84.632 R1.1 ; 111.807,73.398 112.307,72.898 U1.99 112.307,61.61 C1.1
  Top Layer w0.508: R1.1 117.23,84.612 117.23,84.662 117.23,85.595 124.525,92.89 P1.B1
TRACECLK: P1.A21 U1.42 | length 16.7
  Top Layer w0.152: v1(102.307,92.456) 103.557,91.206 103.557,91.066 104.578,90.045 104.578,88.306 104.724,88.161 104.724,83.208 104.807,83.125 U1.42
  Bottom Layer w0.152: v1(102.307,92.456) 102.307,95.909 P1.A21
TRACED0: P1.A22 U1.46 | length 16.2
  Top Layer w0.152: v1(101.396,90.852) 101.52,90.852 101.717,90.655 101.727,90.655 101.727,90.551 102.807,89.471 U1.46
  Bottom Layer w0.152: v1(101.396,90.852) 101.449,90.905 101.449,91.386 101.525,91.462 P1.A22
TRACED1: P1.A23 U1.45 | length 17.6
  Top Layer w0.152: v1(100.525,91.462) 100.561,91.462 100.92,91.821 101.218,91.821 103.307,89.732 U1.45
  Bottom Layer w0.152: v1(100.525,91.462) P1.A23
TRACED2: P1.A24 U1.44 | length 20.2
  Top Layer w0.152: v1(99.397,91.34) 99.822,91.765 99.822,92.118 100.16,92.456 101.05,92.456 103.807,89.699 U1.44
  Bottom Layer w0.152: v1(99.397,91.34) 99.397,96 P1.A24
TRACED3: P1.A25 U1.43 | length 21.5
  Top Layer w0.152: v1(98.552,91.34) 99.998,92.786 101.187,92.786 104.248,89.725 104.248,85.922 104.307,85.864 U1.43
  Bottom Layer w0.152: P1.A25 98.552,96.1 v1(98.552,91.34)
VCC1.0: P1.B6
VCC1.2: P1.B7
VCC1.8: P1.B8
VCC2.5: P1.A4
VCC5.0: P1.A6
VCCADJ: P1.A7
pads on no net: MH1.1 MH2.1 P1.A29 P1.A30 P1.B25 R1.0 R2.0 R3.0 R4.0 R5.0 U1.4 U1.7 U1.8 U1.9 U1.10 U1.11 U1.12 U1.13 U1.14 U1.17 U1.18 U1.21 U1.26 U1.27 U1.28 U1.29 U1.30 U1.31 U1.32 U1.33 U1.47 U1.51 U1.53 U1.54 U1.55 U1.56 U1.57 U1.58 U1.59 U1.70 U1.71 U1.72 U1.73 U1.76 U1.77 U1.78 U1.79 U1.80 U1.81 U1.82 U1.83 U1.84 U1.85 U1.86 U1.87 U1.100
copper on no net: | length 4.2
  Bottom Layer w0.508: 83.025,97.039 83.025,99.127 ; 133.025,97.039 133.025,99.127

## Polygon pours and split planes (outlines as drawn)
SHUNTL on Top Layer "SHUNTL_L01_P001" (solid, pour order 1): 101.525,78.898 101.748,79.121 111.87,79.121 112.807,78.184 112.807,72.323 101.875,72.323 101.525,72.673
GND on Bottom Layer "GND_L02_P000" (solid, remove dead copper, pour order 0): 78.359,105.283 78.867,104.775 88.646,104.775 88.646,97.79 91.186,95.25 125.984,95.25 125.984,104.902 127.508,106.426 141.097,106.426 141.097,49.784 135.763,44.45 76.2,44.45

## Silkscreen, mask and mechanical layers (free items; w line width, h text height)
Top Overlay:
  drawing of 17 lines, arcs and shapes, not listed
  text "Enable 3.3V Regulator" at 134.623,75.438 h2.03 r90
  text "MK82FN256VLL15" at 96.393,65.405 h2.03 r90
  text "K82F Target Board" at 82.296,59.309 h3.05
  text "Millie" at 119.137,57.673 h2.03 r315
  text "For ChipWhisperer" at 82.296,57.15 h2.54
  text "CW312 Board" at 82.296,54.61 h2.54
Bottom Overlay:
  drawing of 5 lines, arcs and shapes, not listed
  text "C" at 98.908,59.639 h6.35
  text "W" at 85.954,57.861 h6.35
  text "p" at 92.05,57.861 h6.35
  text "NewAE Technology Inc. / NAE-CW312T-K82F-03" at 117.475,53.467 h1.14
Mechanical 1:
  lines w0.1: 78.457,102.985 78.457,104.043 cw(c79.032,104.043) 79.032,104.618 87.532,104.618 cw(c87.532,103.775) 88.375,103.775 88.375,93.881 88.375,92.153 ; 90.875,92.161 90.875,93.881 90.875,99.127 91.375,99.627 111.575,99.627 112.075,99.127 112.075,92.177 ; 113.975,92.177 113.975,99.127 114.475,99.627 124.675,99.627 125.175,99.127 125.175,93.915 125.175,92.075 ; 127.675,91.961 127.675,104.061 cw(c128.232,104.061) 128.232,104.618 136.732,104.618 cw(c136.732,104.218) 137.132,104.218
  lines w0.101: 78.457,102.985 78.457,52.197 ccw(c79.727,52.197) 79.727,50.927 135.862,50.927 ccw(c135.862,52.197) 137.132,52.197 137.132,104.218 ; 88.375,92.153 ccw(c89.114,92.153) 89.114,91.415 90.128,91.415 ccw(c90.128,92.161) 90.875,92.161 ; 112.075,92.177 ccw(c112.939,92.177) 112.939,91.313 113.111,91.313 ccw(c113.111,92.177) 113.975,92.177 ; 125.175,92.075 ccw(c126.064,92.075) 126.064,91.186 126.9,91.186 ccw(c126.9,91.961) 127.675,91.961